# EAGLE board Power_Distro_Board_V2 (EAGLE 8.3.2)
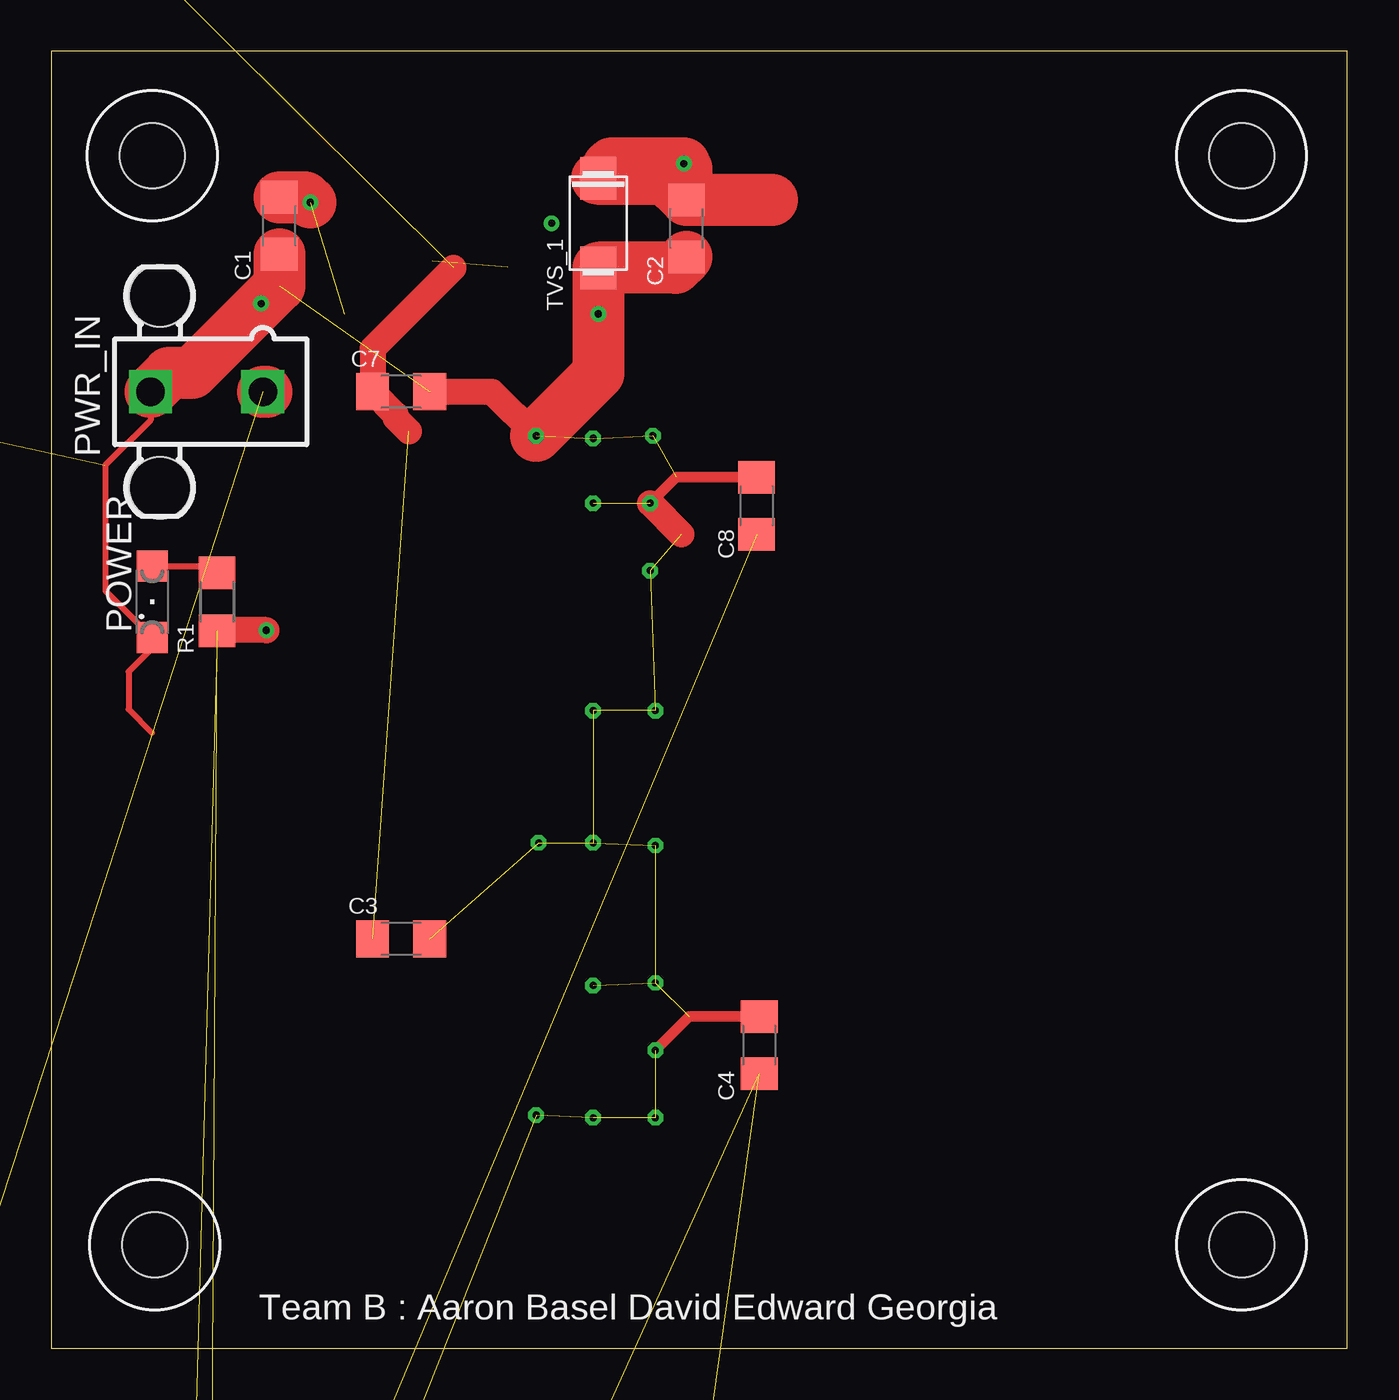
[diagram p0: board, top side]
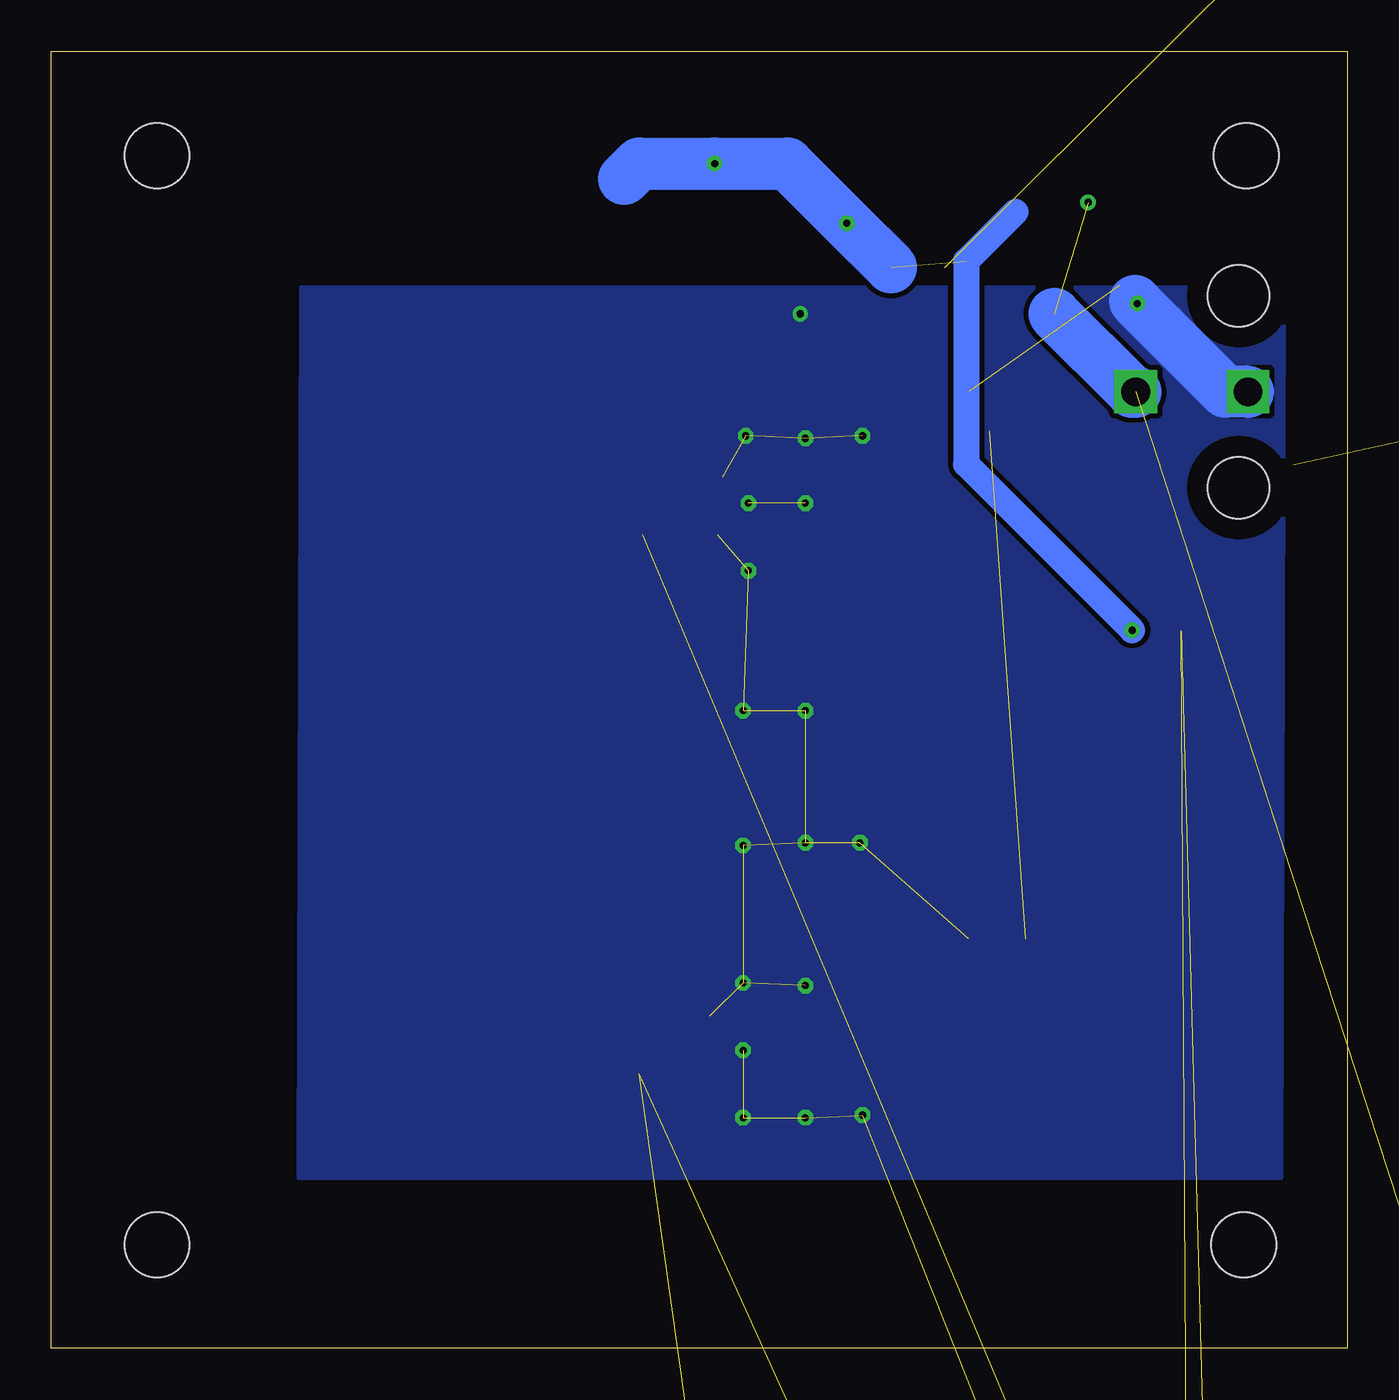
[diagram p1: board, bottom side, seen from below]

Size 63.48 x 63.55 mm. Coordinates in mm from the lower left corner, seen from the top.
Outline: 0,0 63.48,0 63.48,63.55 0,63.55 0,0
Copper layers (1*16): Top 0.035mm / dielectric 1.5mm / Bottom 0.035mm
Design rules "default *": minimum track width 6mil, minimum drill 0.35mm, track to track 6mil, track to pad 6mil, pad to pad 6mil, via to via 6mil, smd to smd 6mil, copper to edge 40mil, drill to drill 6mil, minimum pad ring 10mil, minimum via ring 8mil, stop-mask expansion 4mil, vias tented up to drill 0mil, thermal gap 10mil
Net classes: 0 default: width 0.025 mm, drill 0.254 mm, clearance 0.254 mm; 1 Power IN: width 4.801 mm; 2 Motor_OUT: width 4.801 mm; 3 3.3V_1A: width 0.305 mm; 4 5V_1A: width 0.305 mm; 5 12V_2A: width 0.813 mm
Holes 3.17 mm at 5.08,5.08 58.29,5.08 4.95,58.42 58.29,58.42

## Footprints (pad centres in the part's own frame; a part is rotated, then mirrored left to right if it is on the bottom)
SIP5 = drill 1: EN -5.08,-7.62; PG -7.62,-7.62; VIN -2.54,-7.62; VOUT 2.54,-7.62 | drill 1 square: GND 0,-7.62 | hole 2.184: 6.604,-6.604; -6.604,6.604
2X05 = drill 1.016 octagon: 1 -5.08,-1.27; 2 -5.08,1.27; 3 -2.54,-1.27; 4 -2.54,1.27; 5 0,-1.27; 6 0,1.27; 7 2.54,-1.27; 8 2.54,1.27; 9 5.08,-1.27; 10 5.08,1.27
P1-13 = drill 1.321 pad 2.159 octagon: TP 0,0
SML1206 = smd 1.5 x 1.5: A 1.75,0; C -1.75,0
5566-2 = drill 1.4 square: 1 0,-2.75; 2 0,2.75 | hole 3: 4.7,2.29; -4.7,2.29
2X4PIN_REG = drill 1: ENABLE -13.97,-6.35; VIN1 -16.51,1.27; VIN2 -16.51,-1.27; VOUT1 16.51,-3.81; VOUT2 16.51,-6.35 | drill 1 square: GND1 -16.51,6.35; GND2 -16.51,3.81; GND3 16.51,1.27; GND4 16.51,-1.27
C1206 = smd 1.6 x 1.8: 1 -1.4,0; 2 1.4,0
SSOP16 = smd 2 x 0.46: 1 -4.08,2.275; 2 -4.08,1.625; 3 -4.08,0.975; 4 -4.08,0.325; 5 -4.08,-0.325; 6 -4.08,-0.975; 7 -4.08,-1.625; 8 -4.08,-2.275; 9 4.08,-2.275; 10 4.08,-1.625; 11 4.08,-0.975; 12 4.08,-0.325; 13 4.08,0.325; 14 4.08,0.975; 15 4.08,1.625; 16 4.08,2.275
NANO = smd 3.25 x 3.43: VIN+ -4.675,0; VIN- 4.675,0
R1206W = smd 1.8 x 1.2: 1 -1.499,0; 2 1.499,0
1X06 = drill 1.016 long: 1 -6.35,0; 2 -3.81,0; 3 -1.27,0; 4 1.27,0; 5 3.81,0; 6 6.35,0
R1206 = smd 1.6 x 1.803: 1 -1.422,0; 2 1.422,0
70543-02 = drill 1.016 long: 1 -1.27,0; 2 1.27,0
TO220ACS = drill 1.016 long: A 2.54,-2.54; C -2.54,-2.54
DO-214AC = smd 2.083 x 1.778: 1 -2.184,0; 2 2.184,0

## Placement (x,y rotation side)
2.5A  POLOLU_5VREG  [SIP5]  -158.37,-808.1 0 top  (outside the outline)
5A  POLOLU_5VREG  [SIP5]  -158.37,-832.23 0 top  (outside the outline)
5V_RAIL  5V 5A  [2X05]  -97.79,-418.72 0 top  (outside the outline)
5V_TEST  TPPAD1-13  [P1-13]  5.21,-30.1 0 top  (outside the outline)
5V_TEST1  TPPAD1-13  [P1-13]  -162.69,-864.36 0 top  (outside the outline)
12V_1  GREEN  [SML1206]  -64.64,-120.02 0 top  (outside the outline)
12V_2  GREEN  [SML1206]  -90.17,-307.98 0 top  (outside the outline)
12V_3  GREEN  [SML1206]  -90.17,-353.57 0 top  (outside the outline)
12V_4  GREEN  [SML1206]  -164.21,105.92 0 top  (outside the outline)
12V_TEST  TPPAD1-13  [P1-13]  5.21,-73.28 0 top  (outside the outline)
24V_2A_1  5566-2  [5566-2]  -121.16,-436.75 0 top  (outside the outline)
24V_2A_1_  GREEN  [SML1206]  -169.29,-508 0 top  (outside the outline)
24V_2A_1_1  GREEN  [SML1206]  -109.98,193.42 0 top  (outside the outline)
24V_2A_2  5566-2  [5566-2]  -114.81,175.77 0 top  (outside the outline)
24V_REG  POLOLU_24VSTEPUP  [2X4PIN_REG]  -149.48,176.4 0 top  (outside the outline)
24V_REG1  POLOLU_24VSTEPUP  [2X4PIN_REG]  -149.48,-1176.15 0 top  (outside the outline)
24V_TEST_1  TPPAD1-13  [P1-13]  5.21,-51.69 0 top  (outside the outline)
24V_TEST_2  TPPAD1-13  [P1-13]  -162.69,201.17 0 top  (outside the outline)
C1  150uF  [C1206]  11.18,54.99 90 top
C1_1  100nF  [C1206]  -171.07,-536.58 0 top  (outside the outline)
C1_2  10uF  [C1206]  -171.07,-542.8 0 top  (outside the outline)
C2  100uF  [C1206]  31.11,54.86 90 top
C3  10uF  [C1206]  17.14,20.07 180 top
C4  10uF  [C1206]  34.67,14.86 270 top
C5  10uF  [C1206]  -123.06,193.42 0 top  (outside the outline)
C6  10uF  [C1206]  -117.35,193.42 0 top  (outside the outline)
C7  10uF  [C1206]  17.14,46.86 180 top
C8  10uF  [C1206]  34.54,41.27 270 top
C9  10uF  [C1206]  -171.07,-850.52 0 top  (outside the outline)
EN1  TPPAD1-13  [P1-13]  -162.69,-1327.91 0 top  (outside the outline)
EN2  TPPAD1-13  [P1-13]  -162.69,-1371.09 0 top  (outside the outline)
ENABLE1  TPPAD1-13  [P1-13]  -162.69,-1392.68 0 top  (outside the outline)
ENABLE2  TPPAD1-13  [P1-13]  -162.69,-1414.27 0 top  (outside the outline)
ENC_1  ENCODER_AS5045B  [SSOP16]  -167.13,-528.07 0 top  (outside the outline)
F1  60VDC 50A  [NANO]  -167.13,-516.76 0 top  (outside the outline)
F2  60VDC 20A  [R1206W]  -169.04,-1428.24 0 top  (outside the outline)
F3  60VDC 20A  [R1206W]  -169.04,-1445.01 0 top  (outside the outline)
F4  60VDC 20A  [R1206W]  -169.04,-1451.23 0 top  (outside the outline)
F5  60VDC 20A  [R1206W]  -169.04,-1457.45 0 top  (outside the outline)
F6  60VDC 3A  [R1206W]  -169.04,-1463.67 0 top  (outside the outline)
F7  60VDC 3A  [R1206W]  -169.04,-1469.9 0 top  (outside the outline)
F8  60VDC 3A  [R1206W]  -169.04,-1482.34 0 top  (outside the outline)
F9  60VDC 5A  [R1206W]  -169.04,-1476.12 0 top  (outside the outline)
MAIN_1  [1X06]  -159.51,-599.19 0 top  (outside the outline)
MOTOR_OUT_1  5566-2  [5566-2]  -16.26,-92.2 0 top  (outside the outline)
MOTOR_OUT_2  5566-2  [5566-2]  -89.66,-279.02 0 top  (outside the outline)
MOTOR_OUT_3  5566-2  [5566-2]  -89.66,-324.61 0 top  (outside the outline)
MOTOR_OUT_4  5566-2  [5566-2]  -162.94,76.83 0 top  (outside the outline)
PG1  TPPAD1-13  [P1-13]  -162.69,-1306.32 0 top  (outside the outline)
PG2  TPPAD1-13  [P1-13]  -162.69,-1349.5 0 top  (outside the outline)
POWER  GREEN  [SML1206]  4.95,36.58 90 top
PWR_IN  5566-2  [5566-2]  7.62,46.86 90 top
R1  500  [R1206]  8.13,36.58 90 top
R2  470  [R1206]  -66.42,-126.24 0 top  (outside the outline)
R3  470  [R1206]  -97.66,-308.23 0 top  (outside the outline)
R4  470  [R1206]  -97.66,-353.82 0 top  (outside the outline)
R5  1100  [R1206]  -171.07,-502.03 0 top  (outside the outline)
R6  1100  [R1206]  -128.78,193.42 0 top  (outside the outline)
R7  470  [R1206]  -171.07,105.92 0 top  (outside the outline)
R9  150  [R1206]  -171.07,-453.26 0 top  (outside the outline)
R10  150  [R1206]  -171.07,-477.65 0 top  (outside the outline)
RAIL_5V  GREEN  [SML1206]  -169.29,-483.62 0 top  (outside the outline)
RPI_5V  GREEN  [SML1206]  -169.29,-459.23 0 top  (outside the outline)
RPI_OUT  C-GRID-02-70543  [70543-02]  -91.19,-364.49 0 top  (outside the outline)
RVP_1  15V  [TO220ACS]  -2.54,-1232.03 0 top  (outside the outline)
RVP_2  15V  [TO220ACS]  -2.54,-1249.81 0 top  (outside the outline)
RVP_3  15V  [TO220ACS]  -2.54,-1267.59 0 top  (outside the outline)
RVP_4  15V  [TO220ACS]  -2.54,-1285.37 0 top  (outside the outline)
SUB_1  [1X06]  -159.51,-614.43 0 top  (outside the outline)
TVS_1  16V  [DO-214AC]  26.8,55.12 270 top

## Library data of the parts
2.5A 5A 24V_REG 24V_REG1 TVS_1 = POWER_DISTRO
5V_RAIL MAIN_1 SUB_1 = pinhead
5V_TEST 5V_TEST1 12V_TEST 24V_TEST_1 24V_TEST_2 EN1 EN2 ENABLE1 ENABLE2 PG1 PG2 = testpad
12V_1-12V_4 24V_2A_1_ 24V_2A_1_1 POWER RAIL_5V RPI_5V = led
24V_2A_1 24V_2A_2 MOTOR_OUT_1-MOTOR_OUT_4 PWR_IN = con-molex; OC_FARNELL: 1822072; OC_NEWARK: unknown
C1 C1_1 C1_2 C2-C9 F2-F9 R1-R7 R9 R10 = resistor
ENC_1 F1 = minebot_PDR
RPI_OUT = con-molex; OC_FARNELL: unknown; OC_NEWARK: unknown
RVP_1-RVP_4 = diode

## Nets
5V_REG: 2.5A.VOUT 5V_TEST.TP C8.2 F8.1
5V_REG1: F8.2 R9.2 RPI_OUT.1
5V_REG3: 5V_RAIL.1 5V_RAIL.3 5V_RAIL.5 5V_RAIL.7 5V_RAIL.9 F9.2 R10.2
12V_REG: 12V_TEST.TP C2.2 F1.VIN- R1.1 RVP_1.A RVP_2.A RVP_3.A RVP_4.A TVS_1.1
12V_REG_TVS: 2.5A.VIN 5A.VIN 24V_REG1.VIN1 24V_REG1.VIN2 24V_REG.VIN1 24V_REG.VIN2 C3.2 C5.2 C7.2
A_1: ENC_1.3 SUB_1.3
B_1: ENC_1.4 SUB_1.4
CLK_1: ENC_1.10 MAIN_1.4
CSN_1: ENC_1.11 MAIN_1.3
DO_1: ENC_1.9 MAIN_1.5
GND: 2.5A.GND 5A.GND 5V_RAIL.2 5V_RAIL.4 5V_RAIL.6 5V_RAIL.8 5V_RAIL.10 12V_1.C 12V_2.C 12V_3.C 12V_4.C 24V_2A_1.2 24V_2A_1_1.C 24V_2A_1_.C 24V_2A_2.2 24V_REG1.GND1 24V_REG1.GND2 24V_REG1.GND3 24V_REG1.GND4 24V_REG.GND1 24V_REG.GND2 24V_REG.GND3 24V_REG.GND4 C1.1 C2.1 C3.1 C4.1 C5.1 C6.1 C7.1 C8.1 C9.1 MOTOR_OUT_1.2 MOTOR_OUT_2.2 MOTOR_OUT_3.2 MOTOR_OUT_4.2 POWER.C PWR_IN.2 RAIL_5V.C RPI_5V.C RPI_OUT.2 TVS_1.2
GND_1: C1_1.2 C1_2.2 ENC_1.7 MAIN_1.2
I_1: ENC_1.6 SUB_1.5
MAG_DEC_N_1: ENC_1.2 SUB_1.2
MAG_INC_N_1: ENC_1.1 SUB_1.1
N$1: POWER.A R1.2
N$2: 2.5A.PG PG1.TP
N$3: C1.2 F1.VIN+ PWR_IN.1
N$4: C1_2.1 ENC_1.15
N$5: F2.1 RVP_1.C
N$6: 2.5A.EN EN1.TP
N$7: 24V_REG1.VOUT1 24V_REG1.VOUT2 24V_TEST_1.TP C4.2
N$8: 5A.PG PG2.TP
N$9: 12V_1.A R2.2
N$10: R9.1 RPI_5V.A
N$11: R10.1 RAIL_5V.A
N$12: F2.2 MOTOR_OUT_1.1 R2.1
N$13: F6.1
N$14: F3.1 RVP_2.C
N$15: 5A.EN EN2.TP
N$16: 12V_2.A R3.2
N$17: 24V_2A_1_1.A R6.2
N$18: F3.2 MOTOR_OUT_2.1 R3.1
N$20: 24V_2A_1.1 F6.2 R5.1
N$22: F4.1 RVP_3.C
N$24: 12V_3.A R4.2
N$25: F4.2 MOTOR_OUT_3.1 R4.1
N$26: F5.1 RVP_4.C
N$27: 12V_4.A R7.2
N$28: F5.2 MOTOR_OUT_4.1 R7.1
N$29: 24V_2A_1_.A R5.2
N$30: 24V_REG1.ENABLE ENABLE1.TP
N$31: 24V_REG.VOUT1 24V_REG.VOUT2 24V_TEST_2.TP C6.2
N$32: 5A.VOUT 5V_TEST1.TP C9.2 F9.1
N$33: F7.1
N$34: 24V_2A_2.1 F7.2 R6.1
N$35: 24V_REG.ENABLE ENABLE2.TP
PDIO_1: ENC_1.8 SUB_1.6
PWM_1: ENC_1.12 MAIN_1.6
VIN_1: C1_1.1 ENC_1.16 MAIN_1.1

## Tracks (layer width: path | path; a pad name or v marks a point on that pad's centre or on a via)
5V_REG  (3 unrouted)
5V_REG1  (2 unrouted)
5V_REG3  (6 unrouted)
12V_REG  (via drill 0.35)  (7 unrouted)
  Top 1.27: v10.54,35.18 8.15,35.18 R1.1
  Top 2.54: C2.2 30.08,57.3 TVS_1.1 26.72,57.3 | C2.2 35.31,56.26 | C2.2 31.11,57.78 30.99,57.91 v30.99,58.04 27.43,58.04 27.3,57.91
  Bottom 1.27: 16.26,55.67 18.67,53.26 18.67,43.31 v10.54,35.18
  Bottom 2.54: 35.43,57.28 34.67,58.04 v30.99,58.04 27.43,58.04 v24.51,55.12 22.35,52.96
12V_REG_TVS  (8 unrouted)
  Top 1.27: 19.71,52.93 15.74,48.97 C7.2 16.86,45.75 16.86,45.59 17.53,44.92
A_1  (1 unrouted)
B_1  (1 unrouted)
CLK_1  (1 unrouted)
CSN_1  (1 unrouted)
DO_1  (1 unrouted)
GND  (via drill 0.35)  (51 unrouted)
  Top 0.305: PWR_IN.2 4.87,45.48 2.66,43.27 2.66,37.12 POWER.C 4.95,34.3 3.8,33.15 3.8,31.31 4.95,30.16
  Top 0.508: C8.1 30.61,42.67 v29.34,41.4 | C4.1 31.25,16.26 v29.59,14.61
  Top 1.27: C7.1 21.59,46.86 v23.75,44.7 | v29.34,41.4 30.86,39.88
  Top 2.54: PWR_IN.2 5.78,47.78 6.9,47.78 11.18,52.05 C1.1 | C2.1 30.59,52.93 TVS_1.2 v26.8,50.67 26.8,47.75 v23.75,44.7
  Bottom 2.54: PWR_IN.2 5.98,46.86 9.12,49.99 9.12,50.01 v10.29,51.18 10.41,51.31
  other vias: 26.54,11.3 26.54,17.78 23.75,11.43 29.59,11.3 29.59,17.91 26.54,31.24 29.59,31.24 29.59,24.64 26.54,24.77 23.88,24.77 26.54,41.4 26.54,44.58 29.46,44.7 29.34,38.1
  pour Bottom: 3.17,51.94 3.3,8.38 51.31,8.38 51.18,51.94
GND_1  (3 unrouted)
I_1  (1 unrouted)
MAG_DEC_N_1  (1 unrouted)
MAG_INC_N_1  (1 unrouted)
N$1
  Top 0.305: POWER.A 7.8,38.33 R1.2
N$2  (1 unrouted)
N$3  (via drill 0.35)  (2 unrouted)
  Top 2.54: PWR_IN.1 10.54,46.86 | C1.2 12.44,56.39 v12.7,56.13
  Bottom 2.54: PWR_IN.1 10.54,46.86 14.35,50.67
N$4  (1 unrouted)
N$5  (1 unrouted)
N$6  (1 unrouted)
N$7  (3 unrouted)
N$8  (1 unrouted)
N$9  (1 unrouted)
N$10  (1 unrouted)
N$11  (1 unrouted)
N$12  (2 unrouted)
N$14  (1 unrouted)
N$15  (1 unrouted)
N$16  (1 unrouted)
N$17  (1 unrouted)
N$18  (2 unrouted)
N$20  (2 unrouted)
N$22  (1 unrouted)
N$24  (1 unrouted)
N$25  (2 unrouted)
N$26  (1 unrouted)
N$27  (1 unrouted)
N$28  (2 unrouted)
N$29  (1 unrouted)
N$30  (1 unrouted)
N$31  (3 unrouted)
N$32  (3 unrouted)
N$34  (2 unrouted)
N$35  (1 unrouted)
PDIO_1  (1 unrouted)
PWM_1  (1 unrouted)
VIN_1  (2 unrouted)

## Text on the board
tNames: Team B : Aaron Basel David Edward Georgia
tDocu: **NOTE : / / There will be 27 DRC overlap errors. / Those are all vias within the GND pad of / the 3 linear voltage regulators included. / These are added on purpose, with thermals generated, / will help with power dissipation to the ground plane / at the bottom.